# EAGLE board pcb (EAGLE 9.7.0)
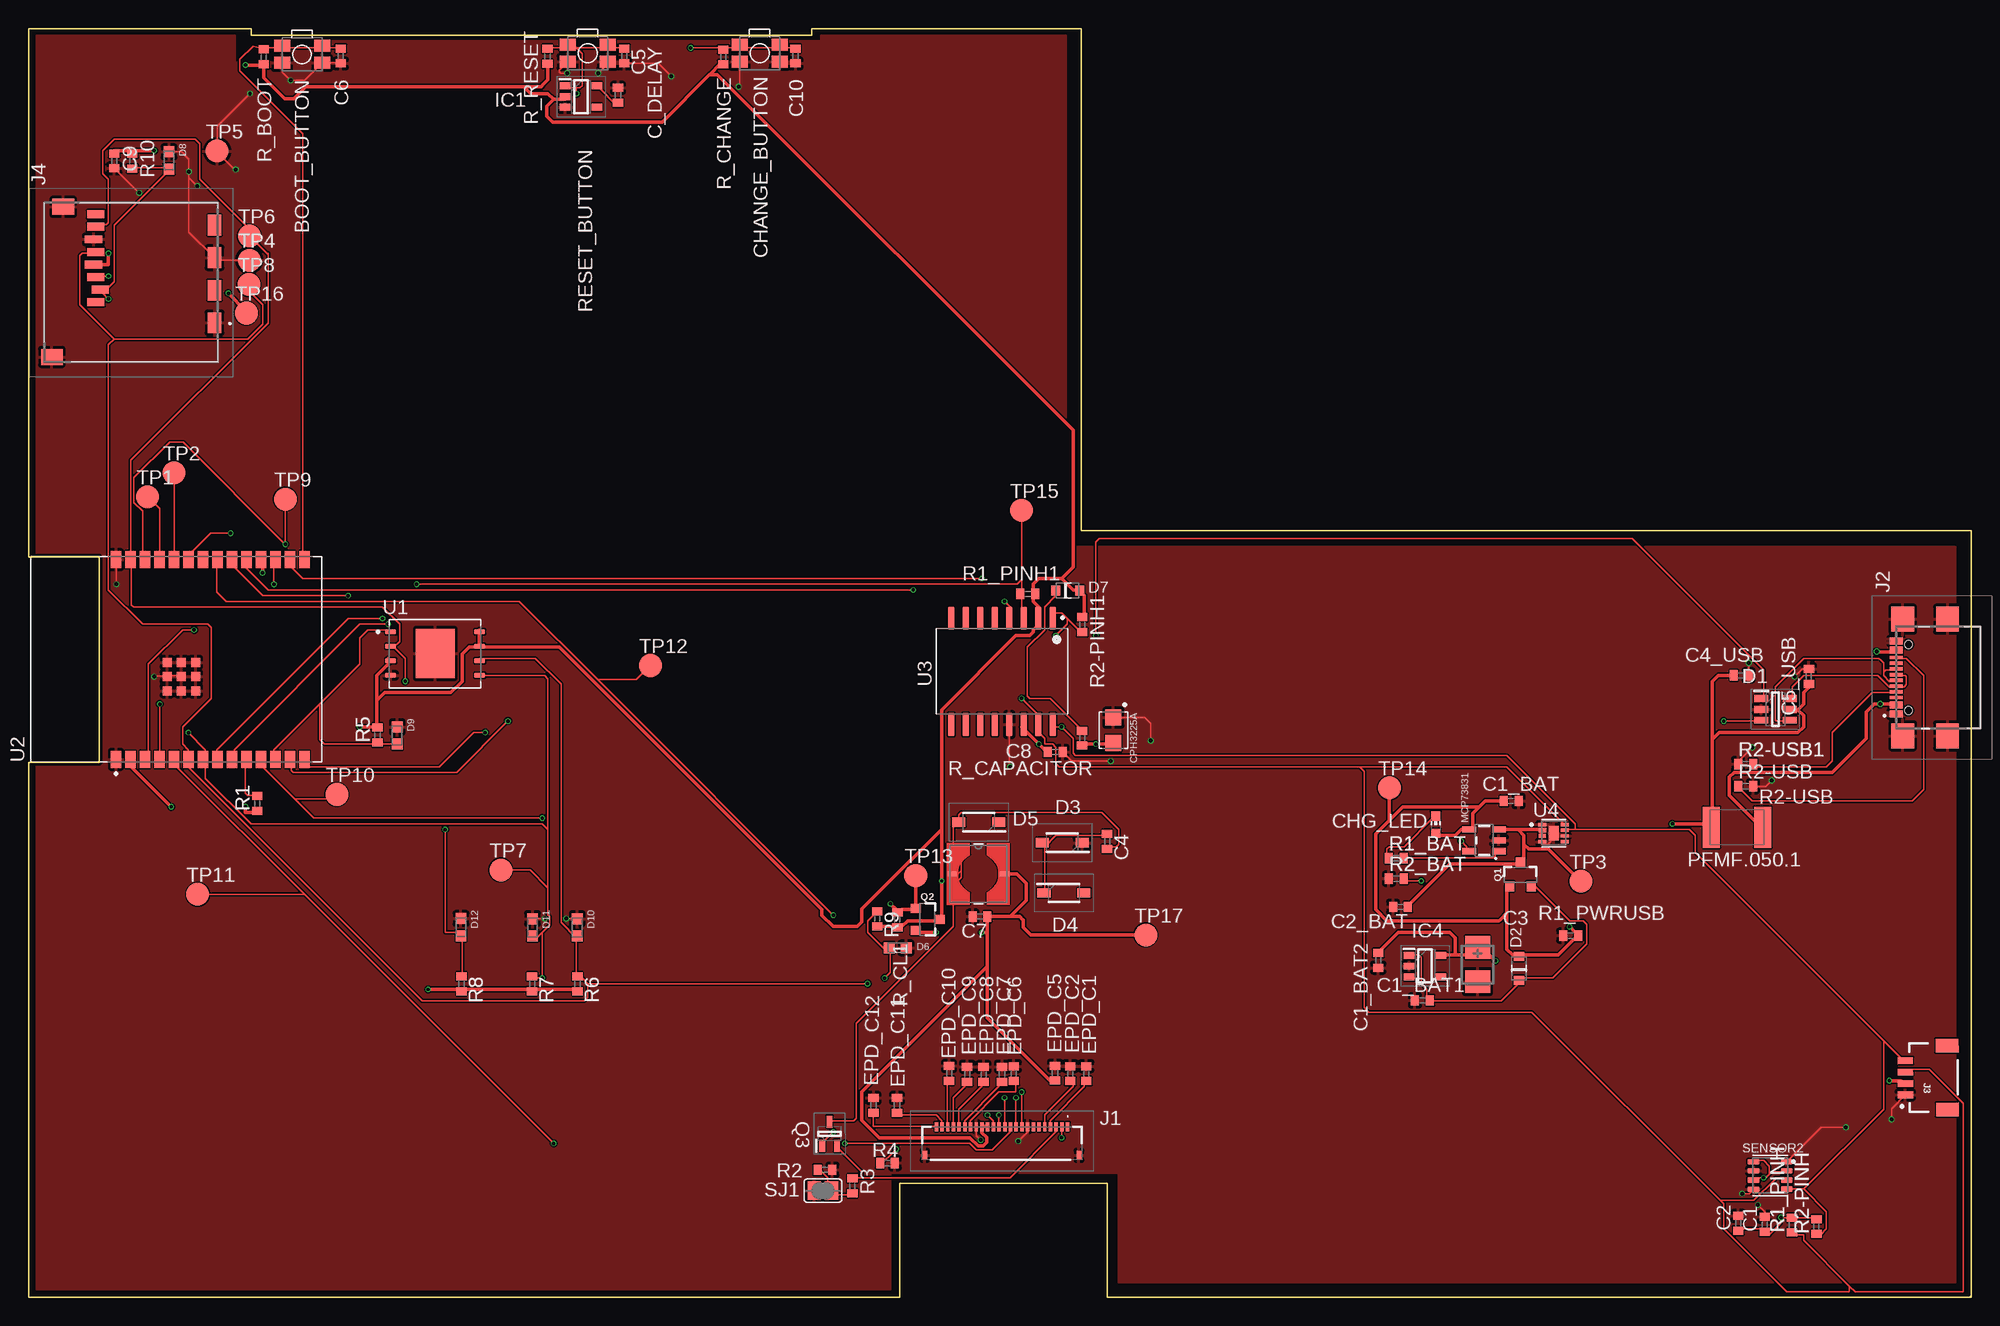
[diagram p0: board, top side]
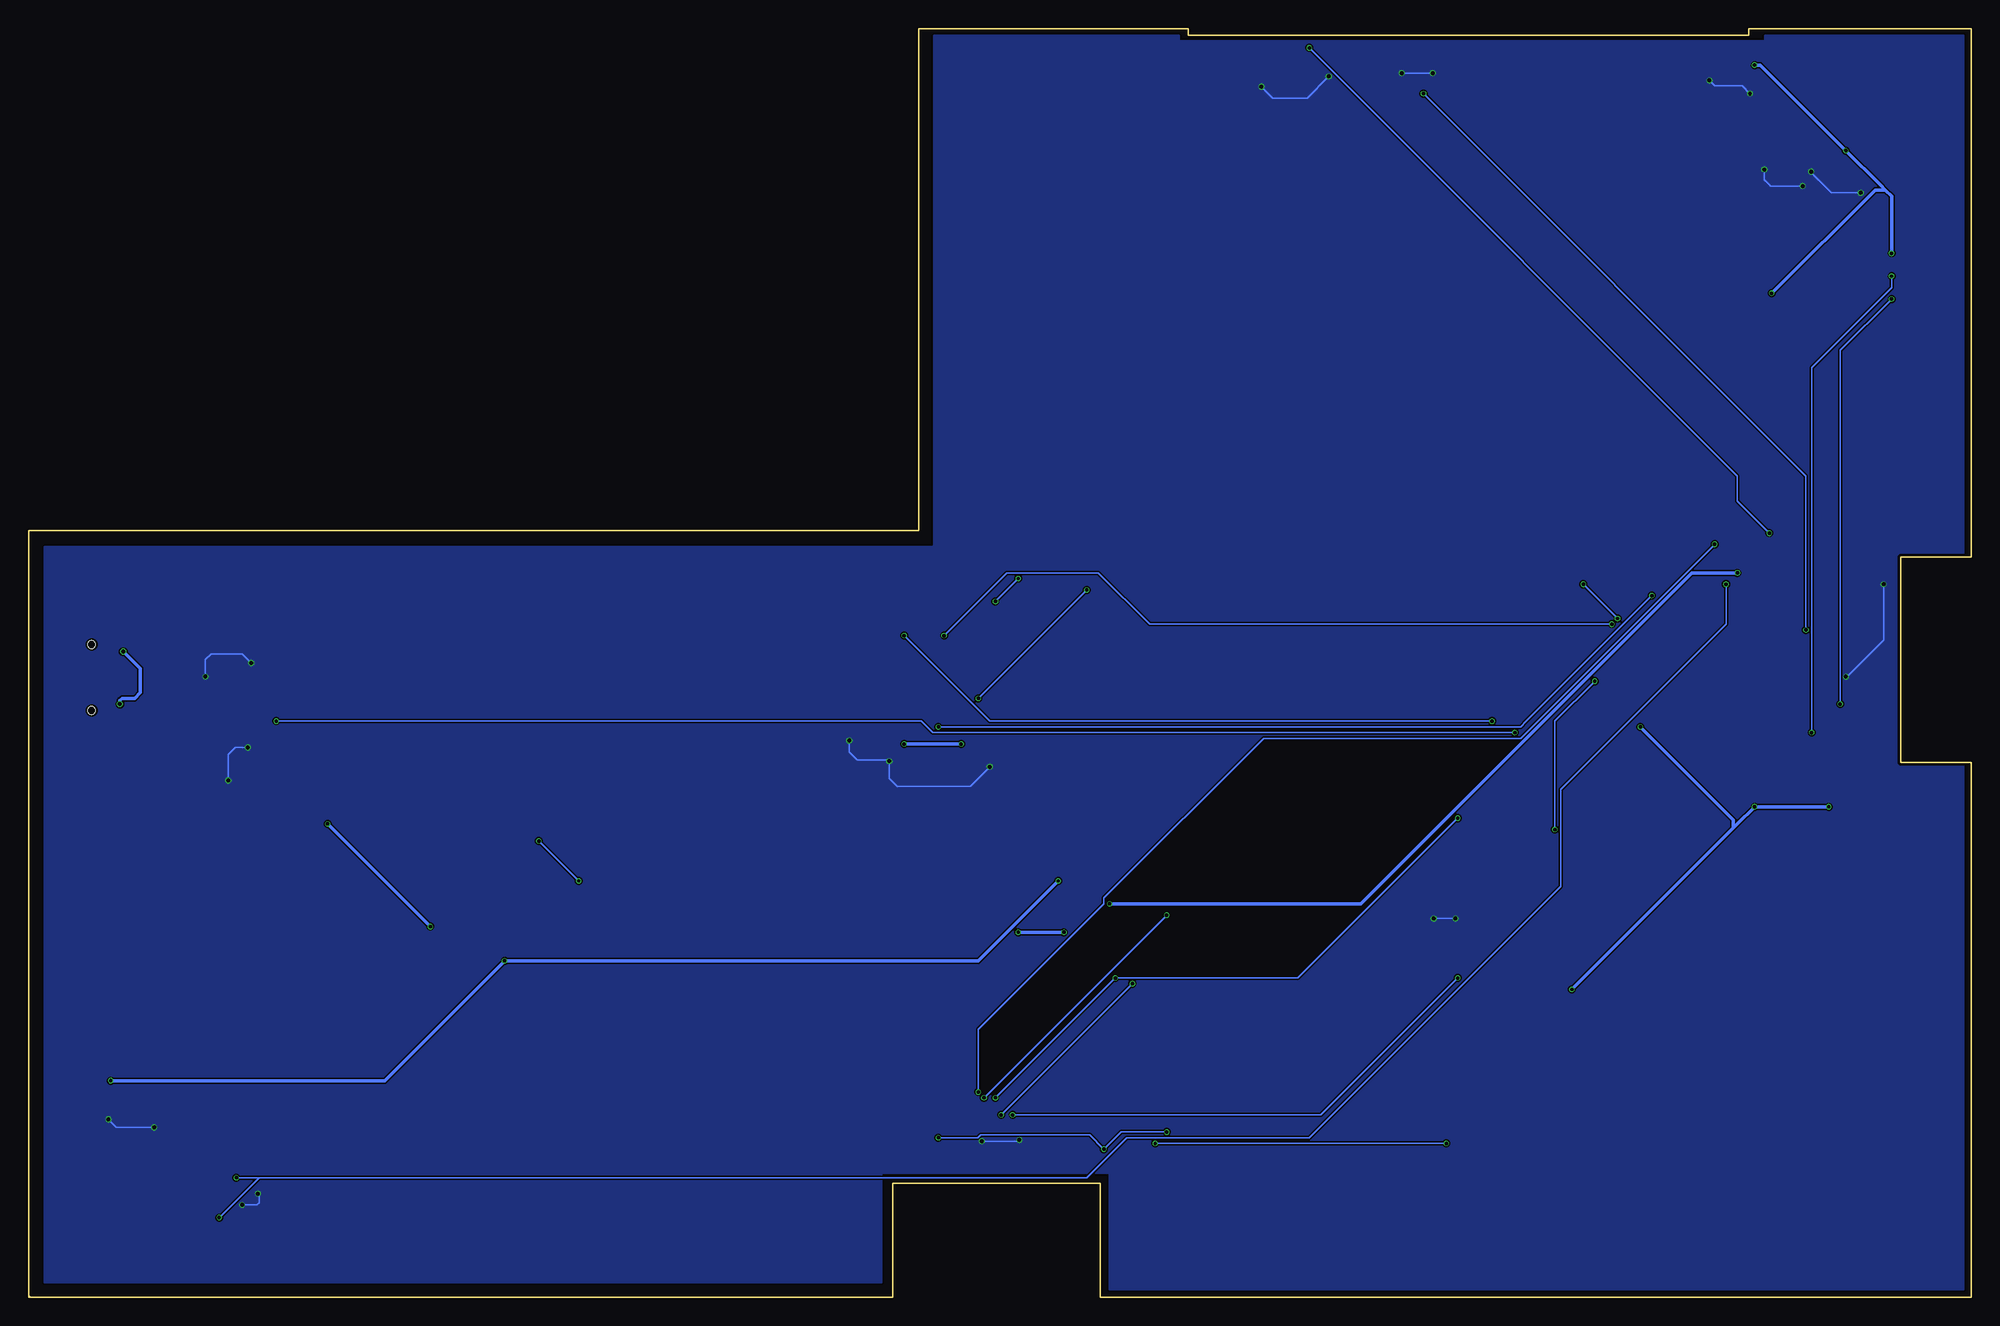
[diagram p1: board, bottom side, seen from below]

Size 170.2 x 111.2 mm. Coordinates in mm from the lower left corner, seen from the top.
Outline: 170.2,0 95.8,0 94.5,0 94.5,10 76.47,10 76.3,10 76.3,0 0,0 0,46.9 6.2,46.9 6.2,64.9 0,64.9 0,111.2 19.5,111.2 19.5,110.6 46,110.6 67.4,110.6 68.6,110.6 68.6,111.2 92.2,111.2 92.2,67.2 170.2,67.2 170.2,0
Outline: 170.1,0.1 170.2,0
Copper layers (1*16): Top 0.035mm / dielectric 1.6mm / Bottom 0.035mm
Design rules "jlcpcb-2layers.dru *": minimum track width 0.15mm, minimum drill 0.3mm, track to track 5mil, track to pad 5mil, pad to pad 5mil, via to via 5mil, smd to smd 5mil, copper to edge 0.2mm, drill to drill 6mil, minimum pad ring 10mil, minimum via ring 3mil, stop-mask expansion 4mil, vias tented up to drill 0mil, thermal gap 10mil
Net classes: 1 power-lines: width 0.3 mm

## Footprints (pad centres in the part's own frame; a part is rotated, then mirrored left to right if it is on the bottom)
MYBUTTON = smd 1.4 x 1.05: 1 1.75,0.75; 2 -1.75,0.75; 3 -1.75,-0.75; 4 1.75,-0.75
ESP32_WROVER_EAGLE-LTSPICE_C0402 = smd 0.7 x 0.9: 1 -0.65,0; 2 0.65,0
RCL_CT3528 = smd 2 x 2.2: + -1.5,0; - 1.5,0
ADAFRUIT_CHIP-LED0603 = smd 0.8 x 0.8: A 0,-0.75; C 0,0.75
CAPCP3225X100N = smd 1.4 x 1.4: 1 -1.1,0; 2 1.1,0
SOT95P280X145-6N = smd 1.2 x 0.6: 1 -1.25,0.95; 2 -1.25,0; 3 -1.25,-0.95; 4 1.25,-0.95; 5 1.25,0; 6 1.25,0.95
ESP32_WROVER_AVX---SD0805S020S1R0_AVX_SD0805S020S1R0_0 = smd 0.8 x 0.9: 1 -1.05,0; 2 1.05,0
SOD3716X135N = smd 1.15 x 0.8: 1 -1.75,0; 2 1.75,0
DIOC1608X36N = smd 0.97 x 0.94: 1 -0.75,0; 2 0.75,0
SOT95P280X125-5N = smd 0.9 x 0.6: 1 -1.4,0.95; 2 -1.4,0; 3 -1.4,-0.95; 4 1.4,-0.95; 5 1.4,0.95
SOT95P280X120-5N = smd 0.9 x 0.6: 1 -1.4,0.95; 2 -1.4,0; 3 -1.4,-0.95; 4 1.4,-0.95; 5 1.4,0.95
FH34SRJ24S05SH99 = smd 0.3 x 0.8: 1 5.75,1.45; 2 5.25,1.45; 3 4.75,1.45; 4 4.25,1.45; 5 3.75,1.45; 6 3.25,1.45; 7 2.75,1.45; 8 2.25,1.45; 9 1.75,1.45; 10 1.25,1.45; 11 0.75,1.45; 12 0.25,1.45; 13 -0.25,1.45; 14 -0.75,1.45; 15 -1.25,1.45; 16 -1.75,1.45; 17 -2.25,1.45; 18 -2.75,1.45; 19 -3.25,1.45; 20 -3.75,1.45; 21 -4.25,1.45; 22 -4.75,1.45; 23 -5.25,1.45; 24 -5.75,1.45 | smd 0.4 x 0.8: MP1 6.75,-1.05; MP2 -6.75,-1.05
SAMACSYS_PARTS_USB4110GFA = smd 0.3 x 1.15: A1 -3.35,3.678; A4 -2.55,3.678; A5 -1.25,3.678; A6 -0.25,3.678; A7 0.25,3.678; A8 1.25,3.678; A9 2.55,3.678; A12 3.35,3.678; B1 3.05,3.678; B4 2.25,3.678; B5 1.75,3.678; B6 0.75,3.678; B7 -0.75,3.678; B8 -1.75,3.678; B9 -2.25,3.678; B12 -3.05,3.678 | smd 2.18 x 2: MP1 -5.11,-0.827; MP2 5.11,-0.827; MP3 -5.11,3.103; MP4 5.11,3.103 | hole 0.65: -2.89,2.603; 2.89,2.603
JST04_1MM_RA = smd 0.6 x 1.35: 1 -1.5,0; 2 -0.5,0; 3 0.5,0; 4 1.5,0 | smd 1.2 x 2: NC1 2.8,-3.675; NC2 -2.8,-3.675
112ATAARR03ATTEND = smd 1.8 x 1.2: G1 10.6,10.4; G2 4.9,10.4; S1 7.75,10.4; S2 2.05,10.4 | smd 1.4 x 1.9: G3 13.6,-3.85; G4 0.45,-2.85 | smd 0.7 x 1.5: P1 8.8,0; P2 7.7,0.4; P3 6.6,0; P4 5.5,-0.2; P5 4.4,0; P6 3.3,-0.2; P7 2.2,0; P8 1.1,0
IND_4828-WE-TPC_WRE = smd 0.813 x 0.406: 1 -2.286,0; 2 2.286,0
ESP32_WROVER_SPARKFUN-IC-POWER_SOT23-5 = smd 0.55 x 1.2: 1 -0.95,-1.3; 2 0,-1.3; 3 0.95,-1.3; 4 0.95,1.3; 5 -0.95,1.3
ESP32C6_VARISTOR_CT/CN1812 = smd 1.5 x 3.6: 1 -2.25,0; 2 2.25,0
ESP32_WROVER_SPARKFUN-DISCRETESEMI_SOT23-3 = smd 0.8 x 0.9: 1 -0.95,-1; 2 0.95,-1; 3 0,1.1
SOT65P210X110-3N = smd 1.05 x 0.5: 1 -1.05,0.65; 2 -1.05,-0.65; 3 1.05,0
ESP32_WROVER_EAGLE-LTSPICE_R0402 = smd 0.7 x 0.9: 1 -0.65,0; 2 0.65,0
ESP32_WROVER_BME680_PSON80P300X300X100-8N = smd 1.016 x 0.5: 1 1.458,1.2; 2 1.458,0.4; 3 1.458,-0.4; 4 1.458,-1.2; 5 -1.458,-1.22; 6 -1.458,-0.4; 7 -1.458,0.4; 8 -1.458,1.2
SJ = smd 1.168 x 1.6: 1 -0.762,0; 2 0.762,0
TP20R = smd 2 x 2: TP 0,0
SON127P600X800X80-9N = smd 0.94 x 0.44: 1 -3.895,1.905; 2 -3.895,0.635; 3 -3.895,-0.635; 4 -3.895,-1.905; 5 3.895,-1.905; 6 3.895,-0.635; 7 3.895,0.635; 8 3.895,1.905 | smd 3.4 x 4.3: 9 0,0
XCVR_ESP32-C6-WROOM-1-N8 = smd 1.5 x 0.9: 1 -8.75,5.26; 2 -8.75,3.99; 3 -8.75,2.72; 4 -8.75,1.45; 5 -8.75,0.18; 6 -8.75,-1.09; 7 -8.75,-2.36; 8 -8.75,-3.63; 9 -8.75,-4.9; 10 -8.75,-6.17; 11 -8.75,-7.44; 12 -8.75,-8.71; 13 -8.75,-9.98; 14 -8.75,-11.25; 15 8.75,-11.25; 16 8.75,-9.98; 17 8.75,-8.71; 18 8.75,-7.44; 19 8.75,-6.17; 20 8.75,-4.9; 21 8.75,-3.63; 22 8.75,-2.36; 23 8.75,-1.09; 24 8.75,0.18; 25 8.75,1.45; 26 8.75,2.72; 27 8.75,3.99; 28 8.75,5.26 | smd 0.8 x 0.8: 29_1 -2.755,0.79; 29_2 -1.505,0.79; 29_3 -0.255,0.79; 29_4 -2.755,-0.46; 29_5 -1.505,-0.46; 29_6 -0.255,-0.46; 29_7 -2.755,-1.71; 29_8 -1.505,-1.71; 29_9 -0.255,-1.71
SOIC127P1032X265-16N = smd 2.05 x 0.59: 1 -4.655,4.445; 2 -4.655,3.175; 3 -4.655,1.905; 4 -4.655,0.635; 5 -4.655,-0.635; 6 -4.655,-1.905; 7 -4.655,-3.175; 8 -4.655,-4.445; 9 4.655,-4.445; 10 4.655,-3.175; 11 4.655,-1.905; 12 4.655,-0.635; 13 4.655,0.635; 14 4.655,1.905; 15 4.655,3.175; 16 4.655,4.445
SON50P200X200X80-9N = smd 0.76 x 0.27: 1 -0.985,0.75; 4 -0.985,-0.75; 5 0.985,-0.75; 6 0.985,-0.25; 7 0.985,0.25; 8 0.985,0.75 | smd 0.762 x 0.381: 2 -0.985,0.25 | smd 0.711 x 0.356: 3 -0.985,-0.25 | smd 0.9 x 1.3: 9 0,0

## Placement (x,y rotation side)
BOOT_BUTTON  BUTTON_CUSYOMV1  [MYBUTTON]  23.96,108.93 180 top
C1  100nF  [ESP32_WROVER_EAGLE-LTSPICE_C0402]  152.09,6.4 90 top
C1_BAT  4.7uF  [ESP32_WROVER_EAGLE-LTSPICE_C0402]  129.88,43.52 0 top
C1_BAT1  4.7uF  [ESP32_WROVER_EAGLE-LTSPICE_C0402]  122.1,26.04 180 top
C1_BAT2  4.7uF  [ESP32_WROVER_EAGLE-LTSPICE_C0402]  118.24,29.54 270 top
C2  100nF  [ESP32_WROVER_EAGLE-LTSPICE_C0402]  149.77,6.5 90 top
C2_BAT  4.7uF  [ESP32_WROVER_EAGLE-LTSPICE_C0402]  120.19,34.22 180 top
C3  100uF TANT  [RCL_CT3528]  126.94,29.17 270 top
C4  4.7uF/25V  [ESP32_WROVER_EAGLE-LTSPICE_C0402]  94.48,39.96 270 top
C4_USB  100nF  [ESP32_WROVER_EAGLE-LTSPICE_C0402]  150.03,54.52 0 top
C5  1nF  [ESP32_WROVER_EAGLE-LTSPICE_C0402]  52.18,108.79 270 top
C5_USB  4.7uF  [ESP32_WROVER_EAGLE-LTSPICE_C0402]  155.96,54.42 90 top
C6  100nF  [ESP32_WROVER_EAGLE-LTSPICE_C0402]  27.35,108.8 270 top
C7  10uF  [ESP32_WROVER_EAGLE-LTSPICE_C0402]  83.35,33.38 180 top
C8  100nF  [ESP32_WROVER_EAGLE-LTSPICE_C0402]  89.93,47.8 0 top
C9  100nF  [ESP32_WROVER_EAGLE-LTSPICE_C0402]  7.51,99.6 270 top
C10  100nF  [ESP32_WROVER_EAGLE-LTSPICE_C0402]  67.19,108.8 270 top
C_DELAY  100nF  [ESP32_WROVER_EAGLE-LTSPICE_C0402]  51.64,105.36 90 top
CHANGE_BUTTON  BUTTON_CUSYOMV1  [MYBUTTON]  64.04,109.03 180 top
CHG_LED  [ADAFRUIT_CHIP-LED0603]  123.27,41.42 0 top
CPH3225A  CPH3225A  [CAPCP3225X100N]  95.03,49.71 270 top
D1  USBLC6-2SC6Y  [SOT95P280X145-6N]  153.03,51.54 0 top
D2  ESP32_WROVER_AVX---SD0805S020S1R0_AVX_SD0805S020S1R0_0_0AVX_SD0805S020S1R0_0_0  [ESP32_WROVER_AVX---SD0805S020S1R0_AVX_SD0805S020S1R0_0]  130.57,28.85 90 top
D3  MBR0530  [SOD3716X135N]  90.56,39.85 180 top
D4  MBR0530  [SOD3716X135N]  90.7,35.45 0 top
D5  MBR0530  [SOD3716X135N]  83.24,41.65 180 top
D6  PGB1010603MR  [DIOC1608X36N]  76.13,30.64 180 top
D7  ESP32_WROVER_AVX---SD0805S020S1R0_AVX_SD0805S020S1R0_0_0AVX_SD0805S020S1R0_0_0  [ESP32_WROVER_AVX---SD0805S020S1R0_AVX_SD0805S020S1R0_0]  91.02,61.95 0 top
D8  PGB1010603MR  [DIOC1608X36N]  12.31,99.64 270 top
D9  PGB1010603MR  [DIOC1608X36N]  32.29,49.24 270 top
D10  PGB1010603MR  [DIOC1608X36N]  48.07,32.44 270 top
D11  PGB1010603MR  [DIOC1608X36N]  44.15,32.44 270 top
D12  PGB1010603MR  [DIOC1608X36N]  37.88,32.45 270 top
EPD_C1  1uF/50V  [ESP32_WROVER_EAGLE-LTSPICE_C0402]  92.65,19.62 270 top
EPD_C2  1uF/50V  [ESP32_WROVER_EAGLE-LTSPICE_C0402]  91.26,19.62 270 top
EPD_C5  0.1uF/50V  [ESP32_WROVER_EAGLE-LTSPICE_C0402]  89.92,19.66 270 top
EPD_C6  1uF/50V  [ESP32_WROVER_EAGLE-LTSPICE_C0402]  86.31,19.62 270 top
EPD_C7  1uF/50V  [ESP32_WROVER_EAGLE-LTSPICE_C0402]  85.28,19.56 270 top
EPD_C8  1uF/50V  [ESP32_WROVER_EAGLE-LTSPICE_C0402]  83.66,19.54 270 top
EPD_C9  1uF/50V  [ESP32_WROVER_EAGLE-LTSPICE_C0402]  82.22,19.56 270 top
EPD_C10  1uF/50V  [ESP32_WROVER_EAGLE-LTSPICE_C0402]  80.64,19.64 270 top
EPD_C11  1uF/50V  [ESP32_WROVER_EAGLE-LTSPICE_C0402]  76.08,16.84 270 top
EPD_C12  1uF/50V  [ESP32_WROVER_EAGLE-LTSPICE_C0402]  74.02,16.84 270 top
IC1  BD5229G-TR  [SOT95P280X125-5N]  48.4,105.24 0 top
IC4  XC6220A331MR-G  [SOT95P280X120-5N]  122.34,29.04 0 top
J1  FH34SRJ-24S-0.5SH_99_  [FH34SRJ24S05SH99]  85.27,13.51 0 top
J2  SAMACSYS_PARTS_USB4110-GF-A  [SAMACSYS_PARTS_USB4110GFA]  167.28,54.33 90 top
J3  QWIIC_RIGHT_ANGLE  [JST04_1MM_RA]  164.41,19.25 90.4 top
J4  112A-TAAR-R03_ATTEND  [112ATAARR03ATTEND]  5.89,96.02 270 top
L1  68uH  [IND_4828-WE-TPC_WRE]  83.2,37.12 0 top
MCP73831  ESP32_WROVER_SPARKFUN-IC-POWER_MCP73831  [ESP32_WROVER_SPARKFUN-IC-POWER_SOT23-5]  127.51,40.06 90 top
PFMF.050.1  ESP32C6_VARISTORCN1812  [ESP32C6_VARISTOR_CT/CN1812]  149.67,41.2 180 top
Q1  20V/4.2A/52mΩ/1.4W  [ESP32_WROVER_SPARKFUN-DISCRETESEMI_SOT23-3]  130.69,37.03 0 top
Q2  20V/4.2A/52mΩ/1.4W  [ESP32_WROVER_SPARKFUN-DISCRETESEMI_SOT23-3]  78.71,33.13 270 top
Q3  SI1308EDL-T1-GE3  [SOT65P210X110-3N]  70.17,14.35 90.1 top
R1  10k  [ESP32_WROVER_EAGLE-LTSPICE_R0402]  20.03,43.28 90 top
R1_BAT  200  [ESP32_WROVER_EAGLE-LTSPICE_R0402]  119.81,38.5 0 top
R1_PINH  10k  [ESP32_WROVER_EAGLE-LTSPICE_R0402]  154.48,6.34 90 top
R1_PINH1  10k  [ESP32_WROVER_EAGLE-LTSPICE_R0402]  87.54,61.66 0 top
R1_PWRUSB  100k  [ESP32_WROVER_EAGLE-LTSPICE_R0402]  135.09,31.71 0 top
R2  2.2  [ESP32_WROVER_EAGLE-LTSPICE_R0402]  69.77,11.18 180 top
R2-PINH  10k  [ESP32_WROVER_EAGLE-LTSPICE_R0402]  156.62,6.22 90 top
R2-PINH1  10k  [ESP32_WROVER_EAGLE-LTSPICE_R0402]  92.3,58.96 90 top
R2-USB  5k1  [ESP32_WROVER_EAGLE-LTSPICE_R0402]  150.43,44.8 0 top
R2-USB1  5k1  [ESP32_WROVER_EAGLE-LTSPICE_R0402]  150.42,46.74 0 top
R2_BAT  2K  [ESP32_WROVER_EAGLE-LTSPICE_R0402]  119.82,36.7 0 top
R3  0.47  [ESP32_WROVER_EAGLE-LTSPICE_R0402]  72.17,9.78 90 top
R4  10k  [ESP32_WROVER_EAGLE-LTSPICE_R0402]  75.25,11.78 180 top
R5  10k  [ESP32_WROVER_EAGLE-LTSPICE_R0402]  30.57,49.28 90 top
R6  10k  [ESP32_WROVER_EAGLE-LTSPICE_R0402]  48.09,27.48 270 top
R7  10k  [ESP32_WROVER_EAGLE-LTSPICE_R0402]  44.11,27.48 270 top
R8  10k  [ESP32_WROVER_EAGLE-LTSPICE_R0402]  37.93,27.48 270 top
R9  10k  [ESP32_WROVER_EAGLE-LTSPICE_R0402]  74.35,33.18 270 top
R10  10k  [ESP32_WROVER_EAGLE-LTSPICE_R0402]  9.09,99.58 90 top
R_BOOT  10k  [ESP32_WROVER_EAGLE-LTSPICE_R0402]  20.61,108.72 270 top
R_CAPACITOR  15  [ESP32_WROVER_EAGLE-LTSPICE_R0402]  92.29,49.01 270 top
R_CHANGE  10k  [ESP32_WROVER_EAGLE-LTSPICE_R0402]  60.86,108.71 270 top
R_CL1  10k  [ESP32_WROVER_EAGLE-LTSPICE_R0402]  76.11,33.1 270 top
R_RESET  10k  [ESP32_WROVER_EAGLE-LTSPICE_R0402]  45.46,108.76 270 top
RESET_BUTTON  BUTTON_CUSYOMV1  [MYBUTTON]  48.98,109.03 180 top
SENSOR2  ESP32_WROVER_BME680_BME680  [ESP32_WROVER_BME680_PSON80P300X300X100-8N]  152.57,10.69 0 top
SJ1  [SJ]  69.59,9.36 0 top
TP1  TPTP20R  [TP20R]  10.44,70.16 0 top
TP2  TPTP20R  [TP20R]  12.76,72.26 0 top
TP3  TPTP20R  [TP20R]  135.98,36.46 0 top
TP4  TPTP20R  [TP20R]  19.34,90.9 0 top
TP5  TPTP20R  [TP20R]  16.52,100.46 0 top
TP6  TPTP20R  [TP20R]  19.34,93.02 0 top
TP7  TPTP20R  [TP20R]  41.37,37.46 0 top
TP8  TPTP20R  [TP20R]  19.29,88.77 0 top
TP9  TPTP20R  [TP20R]  22.5,69.96 0 top
TP10  TPTP20R  [TP20R]  27.02,44.08 0 top
TP11  TPTP20R  [TP20R]  14.82,35.33 0 top
TP12  TPTP20R  [TP20R]  54.47,55.38 0 top
TP13  TPTP20R  [TP20R]  77.72,36.98 0 top
TP14  TPTP20R  [TP20R]  119.22,44.66 0 top
TP15  TPTP20R  [TP20R]  86.97,68.96 0 top
TP16  TPTP20R  [TP20R]  19.09,86.26 0 top
TP17  TPTP20R  [TP20R]  97.87,31.76 0 top
U1  W25Q512JVEIQ  [SON127P600X800X80-9N]  35.62,56.43 0 top
U2  ESP32-C6-WROOM-1-N8  [XCVR_ESP32-C6-WROOM-1-N8]  12.93,55.91 90 top
U3  DS3231SN#  [SOIC127P1032X265-16N]  85.28,54.87 270 top
U4  MAX17048G+T10  [SON50P200X200X80-9N]  133.6,40.69 0 top

## Library data of the parts
BOOT_BUTTON CHANGE_BUTTON CHG_LED PFMF.050.1 RESET_BUTTON SJ1 TP1-TP17 = DeskAssistant v19 v1
C1 C1_BAT C1_BAT1 C1_BAT2 C2 C2_BAT C4 C4_USB C5 C5_USB C6-C10 C_DELAY EPD_C1 EPD_C2 EPD_C5-EPD_C12 = DeskAssistant v19 v1; SPICEMODEL: NONE; SPICEPREFIX: C
C3 = DeskAssistant v19 v1; SPICEPREFIX: C
CPH3225A = DeskAssistant v19 v1; AVAILABILITY: Not in stock; CHECK_PRICES: https://www.snapeda.com/parts/CPH3225A/Seiko+Instruments/view-part/?ref=eda; DESCRIPTION: 11 mF (EDLC) Supercapacitor 3.3 V 1210 (3225 Metric) - -; MF: Seiko Instruments; MP: CPH3225A; PACKAGE: 1210 Seiko; PRICE: None; PURCHASE-URL: https://www.snapeda.com/api/url_track_click_mouser/?unipart_id=562593&manufacturer=Seiko Instruments&part_name=CPH3225A&search_term=None; SNAPEDA_LINK: https://www.snapeda.com/parts/CPH3225A/Seiko+Instruments/view-part/?ref=snap
D1 = DeskAssistant v19 v1; AVAILABILITY: In Stock; CHECK_PRICES: https://www.snapeda.com/parts/USBLC6-2SC6Y/STMicroelectronics/view-part/?ref=eda; DESCRIPTION: 17V Clamp 5A (8/20µs) Ipp Tvs Diode Surface Mount SOT-23-6; MF: STMicroelectronics; MP: USBLC6-2SC6Y; PACKAGE: SOT-23-6 STMicroelectronics; PRICE: None; SNAPEDA_LINK: https://www.snapeda.com/parts/USBLC6-2SC6Y/STMicroelectronics/view-part/?ref=snap
D2 D7 = DeskAssistant v19 v1; CENTROID_NOT_SPECIFIED: No; DATASHEET: http://datasheets.avx.com/schottky.pdf; DIGIKEY_DESCRIPTION: DIODE SCHOTTKY 20V 1A 0805; DIGIKEY_PART_NUMBER: 478-7800-1-ND; LEAD_FREE: yes; MF: AVX; MOUSER_PART_NUMBER: 581-SD0805S020S1R0; PACKAGE: 0805 (2012 metric); PREFIX: D; ROHS: yes; TEMPERATURE_RANGE_HIGH: +125°C; TEMPERATURE_RANGE_LOW: -55°C
D3-D5 = DeskAssistant v19 v1; AVAILABILITY: In Stock; CHECK_PRICES: https://www.snapeda.com/parts/MBR0530/Onsemi/view-part/?ref=eda; DESCRIPTION: Diode Schottky 30 V 500mA Surface Mount SOD-123; MF: ON Semiconductor; MP: MBR0530; PACKAGE: SOD-123-2 ON Semiconductor; PRICE: None; PURCHASE-URL: https://www.snapeda.com/api/url_track_click_mouser/?unipart_id=179458&manufacturer=ON Semiconductor&part_name=MBR0530&search_term=None; SNAPEDA_LINK: https://www.snapeda.com/parts/MBR0530/Onsemi/view-part/?ref=snap
D6 D8-D12 = DeskAssistant v19 v1; AVAILABILITY: In Stock; CHECK_PRICES: https://www.snapeda.com/parts/PGB1010603MR/Littelfuse/view-part/?ref=eda; DESCRIPTION: 150V (Typ) Clamp - Ipp Tvs Diode Surface Mount 0603 (1608 Metric); MF: Littelfuse Inc.; MP: PGB1010603MR; PACKAGE: 0603 Littelfuse Inc.; PRICE: None; PURCHASE-URL: https://www.snapeda.com/api/url_track_click_mouser/?unipart_id=5659453&manufacturer=Littelfuse Inc.&part_name=PGB1010603MR&search_term=None; SNAPEDA_LINK: https://www.snapeda.com/parts/PGB1010603MR/Littelfuse/view-part/?ref=snap
IC1 = DeskAssistant v19 v1; DESCRIPTION: Voltage Detector with Adjustable Delay Time: CMOS processes are utilized to develop high precision, low current consumption CMOS reset ICs that allow arbitrary setting of the delay time. The extensive lineup includes both Nch Open Drain and CMOS output types in a wide range of detection voltages (from 2.3V to 6.0V, in 0.1V steps), enabling selection of the ideal solution based on customer requirements. In addition, the entire series is of course both lead-free and RoHS-compliant.; HEIGHT: 1.25mm; MANUFACTURER_NAME: ROHM Semiconductor; MANUFACTURER_PART_NUMBER: BD5229G-TR; MOUSER_PART_NUMBER: 755-BD5229G-TR; MOUSER_PRICE-STOCK: https://www.mouser.co.uk/ProductDetail/ROHM-Semiconductor/BD5229G-TR?qs=4kLU8WoGk0vvnhrrYwdszw%3D%3D
IC4 = DeskAssistant v19 v1; DESCRIPTION: LDO Voltage Regulators; HEIGHT: 1.2mm; MANUFACTURER_NAME: Torex; MANUFACTURER_PART_NUMBER: XC6220A331MR-G; MOUSER_PART_NUMBER: 865-XC6220A331MR-G; MOUSER_PRICE-STOCK: https://www.mouser.co.uk/ProductDetail/Torex-Semiconductor/XC6220A331MR-G?qs=AsjdqWjXhJ8ZSWznL1J0gg%3D%3D
J1 = DeskAssistant v19 v1; DESCRIPTION: 24 Position FFC, FPC Connector Contacts, Top and Bottom 0.020" (0.50mm) Surface Mount, Right Angle; HEIGHT: 1.1mm; MANUFACTURER_NAME: Hirose; MANUFACTURER_PART_NUMBER: FH34SRJ-24S-0.5SH(99); MOUSER_PART_NUMBER: 798-FH34SRJ24S05SH99; MOUSER_PRICE-STOCK: https://www.mouser.co.uk/ProductDetail/Hirose-Connector/FH34SRJ-24S-0.5SH99?qs=vcbW%252B4%252BSTIpKBl5ap9J8Fw%3D%3D
J2 = DeskAssistant v19 v1; DESCRIPTION: CONN USB 2.0 TYPE-C R/A SMT; HEIGHT: 3.26mm; MANUFACTURER_NAME: GCT (GLOBAL CONNECTOR TECHNOLOGY); MANUFACTURER_PART_NUMBER: USB4110-GF-A; MOUSER_PART_NUMBER: 640-USB4110-GF-A; MOUSER_PRICE-STOCK: https://www.mouser.co.uk/ProductDetail/GCT/USB4110-GF-A?qs=KUoIvG%2F9IlYiZvIXQjyJeA%3D%3D
J3 = DeskAssistant v19 v1; PROD_ID: CONN-13694
J4 = DeskAssistant v19 v1; DESCRIPTION: Micro SD Card Socket, Push-Push Type, Top Mount, SMT, H=1.83mm, 10u; HEIGHT: 1.9mm; MANUFACTURER_NAME: ATTEND; MANUFACTURER_PART_NUMBER: 112A-TAAR-R03 ATTEND
L1 = DeskAssistant v19 v1; COPYRIGHT: Copyright (C) 2024 Ultra Librarian. All rights reserved.; MANUFACTURER_PART_NUMBER: 744043680; MFR_NAME: Wurth Electronics
MCP73831 = DeskAssistant v19 v1; PROD_ID: IC-09995
Q1 Q2 = DeskAssistant v19 v1; PROD_ID: TRAN-14388
Q3 = DeskAssistant v19 v1; AVAILABILITY: In Stock; CHECK_PRICES: https://www.snapeda.com/parts/SI1308EDL-T1-GE3/Vishay+Siliconix/view-part/?ref=eda; DESCRIPTION: Si1308EDL-T1-GE3 N-channel MOSFET Transistor, 1.5 A, 30 V, 3-Pin SC-70 | Siliconix / Vishay SI1308EDL-T1-GE3; MF: Vishay Siliconix; MP: SI1308EDL-T1-GE3; PACKAGE: SOT-323 Vishay Semiconductor; PRICE: None; PURCHASE-URL: https://www.snapeda.com/api/url_track_click_mouser/?unipart_id=274603&manufacturer=Vishay Siliconix&part_name=SI1308EDL-T1-GE3&search_term=None; SNAPEDA_LINK: https://www.snapeda.com/parts/SI1308EDL-T1-GE3/Vishay+Siliconix/view-part/?ref=snap
R1 R1_BAT R1_PINH R1_PINH1 R1_PWRUSB R2 R2-PINH R2-PINH1 R2-USB R2-USB1 R2_BAT R3-R10 R_BOOT R_CAPACITOR R_CHANGE R_CL1 R_RESET = DeskAssistant v19 v1; SPICEMODEL: NONE; SPICEPREFIX: R
SENSOR2 = DeskAssistant v19 v1; AVAILABILITY: Unavailable; DESCRIPTION: Integrated Environmental Unit; MF: Bosch Sensortec; MP: BME680; PACKAGE: LGA-8 Bosch Tools; PRICE: None
U1 = DeskAssistant v19 v1; AVAILABILITY: In Stock; CHECK_PRICES: https://www.snapeda.com/parts/W25Q512JVEIQ/Winbond+Electronics/view-part/?ref=eda; DESCRIPTION: FLASH - NOR Memory IC 512Mb (64M x 8) SPI - Quad I/O 133 MHz 8-WSON (8x6); MF: Winbond Electronics; MP: W25Q512JVEIQ; PACKAGE: Package; PRICE: None; SNAPEDA_LINK: https://www.snapeda.com/parts/W25Q512JVEIQ/Winbond+Electronics/view-part/?ref=snap
U2 = DeskAssistant v19 v1; AVAILABILITY: In Stock; CHECK_PRICES: https://www.snapeda.com/parts/ESP32-C6-WROOM-1-N8/Espressif+Systems/view-part/?ref=eda; DESCRIPTION: Multiprotocol Modules ESP32-C6 module, Wi-Fi 6 in 2.4 GHz band, Bluetooth 5, Zigbee 3.0 and Thread. ESP34-WROOM Compatible - ENGINEERING SAMPLE; MF: Espressif Systems; MP: ESP32-C6-WROOM-1-N8; PACKAGE: None; PRICE: None; SNAPEDA_LINK: https://www.snapeda.com/parts/ESP32-C6-WROOM-1-N8/Espressif+Systems/view-part/?ref=snap
U3 = DeskAssistant v19 v1; AVAILABILITY: In Stock; CHECK_PRICES: https://www.snapeda.com/parts/DS3231SN%23/Analog+Devices/view-part/?ref=eda; DESCRIPTION: Extremely Accurate I²C-Integrated RTC/TCXO/Crystal; MF: Analog Devices; MP: DS3231SN#; PACKAGE: SOIC-16 Maxim; PRICE: None; PURCHASE-URL: https://www.snapeda.com/api/url_track_click_mouser/?unipart_id=99048&manufacturer=Analog Devices&part_name=DS3231SN#&search_term=None; SNAPEDA_LINK: https://www.snapeda.com/parts/DS3231SN%23/Analog+Devices/view-part/?ref=snap
U4 = DeskAssistant v19 v1; AVAILABILITY: In Stock; CHECK_PRICES: https://www.snapeda.com/parts/MAX17048G+T10/Analog+Devices/view-part/?ref=eda; DESCRIPTION: 3µA 1-Cell/2-Cell Fuel Gauge with ModelGauge; MF: Analog Devices; MP: MAX17048G+T10; PACKAGE: TDFN-8 Maxim; PRICE: None; PURCHASE-URL: https://www.snapeda.com/api/url_track_click_mouser/?unipart_id=329239&manufacturer=Analog Devices&part_name=MAX17048G+T10&search_term=None; SNAPEDA_LINK: https://www.snapeda.com/parts/MAX17048G+T10/Analog+Devices/view-part/?ref=snap

## Nets
3V3 [power-lines]: C1_BAT2.1 C3.+ C9.1 D7.2 IC1.2 IC4.5 J3.2 J4.P4 Q2.3 R1.1 R1_PINH1.2 R2-PINH1.2 R5.2 R6.2 R7.2 R8.2 R9.2 R10.2 R_BOOT.2 R_CHANGE.2 R_CL1.2 R_RESET.2 TP16.TP U1.3 U1.7 U1.8 U2.2 U3.2
32KHZ: R2-PINH1.1 U2.9 U3.1
DN: D1.6 J2.A7 J2.B7
DP: D1.4 J2.A6 J2.B6
EPD_3V3 [power-lines]: C7.1 EPD_C5.2 J1.15 J1.16 L1.2 Q2.2 TP17.TP
EPD_3V3_C [power-lines]: Q2.1 R_CL1.1 TP13.TP U2.18
EPD_BUSY: J1.9 TP9.TP U2.26
EPD_CS: D6.2 J1.12 R9.1 TP10.TP U2.11
EPD_DC: J1.11 TP11.TP U2.5
EPD_RST: J1.10 TP12.TP U2.21
FLASH_CS: D9.2 R5.1 U1.1 U2.12
GDR: J1.2 Q3.1 R4.2
GND: BOOT_BUTTON.1 BOOT_BUTTON.2 C1.2 C1_BAT1.2 C1_BAT2.2 C1_BAT.2 C2.2 C2_BAT.2 C3.- C4_USB.2 C5.2 C5_USB.2 C6.2 C7.2 C8.2 C9.2 C10.2 C_DELAY.2 CHANGE_BUTTON.1 CHANGE_BUTTON.2 CPH3225A.1 D1.2 D3.1 D6.1 D8.1 D9.1 D10.1 D11.1 D12.1 EPD_C1.1 EPD_C2.1 EPD_C5.1 EPD_C6.1 EPD_C7.1 EPD_C8.1 EPD_C9.1 EPD_C10.1 EPD_C11.1 EPD_C12.1 IC1.3 IC4.2 J1.8 J1.17 J1.MP1 J1.MP2 J2.A1 J2.A12 J2.B1 J2.B12 J2.MP1 J2.MP2 J2.MP3 J2.MP4 J3.1 J4.G1 J4.G2 J4.G3 J4.G4 J4.P6 MCP73831.2 R1_PWRUSB.1 R2-USB1.1 R2-USB.2 R2.1 R2_BAT.1 R4.1 RESET_BUTTON.1 RESET_BUTTON.2 SENSOR2.1 SENSOR2.5 SENSOR2.7 SJ1.1 TP4.TP TP5.TP U1.4 U1.9 U2.1 U2.28 U2.29_1 U2.29_2 U2.29_3 U2.29_4 U2.29_5 U2.29_6 U2.29_7 U2.29_8 U2.29_9 U3.13 U4.1 U4.4 U4.6 U4.9
GPIO8: R1.2 U2.10
I2C_PW: C1.1 C2.1 R1_PINH.2 R2-PINH.2 SENSOR2.2 SENSOR2.6 SENSOR2.8 U2.17
INT_RTC: R1_PINH1.1 TP15.TP U2.8 U3.3
IO/BOOT: BOOT_BUTTON.3 BOOT_BUTTON.4 C6.1 R_BOOT.1 U2.15
IO/CHANGE: C10.1 CHANGE_BUTTON.3 CHANGE_BUTTON.4 R_CHANGE.1 U2.23
MISO: D12.2 J4.P7 R8.1 TP6.TP U1.2 U2.27
MOSI: D11.2 J1.14 J4.P3 R7.1 TP7.TP U1.5 U2.7
N$1: J2.B5 R2-USB.1
N$2: J2.A5 R2-USB1.2
N$3: C1_BAT1.1 D2.1 IC4.1 IC4.3 Q1.2
N$5: D7.1 R_CAPACITOR.1
N$6: MCP73831.5 R2_BAT.2
N$8: MCP73831.1 R1_BAT.2
N$9: CHG_LED.C R1_BAT.1
N$10: EPD_C1.2 J1.4
N$11: EPD_C2.2 J1.5
N$13: C_DELAY.1 IC1.5
N$15: C4.1 D3.2 D4.1
N$20: EPD_C6.2 J1.18
N$21: EPD_C7.2 J1.19
N$22: EPD_C8.2 J1.20
N$23: EPD_C9.2 J1.21
N$24: EPD_C10.2 J1.22
N$25: EPD_C11.2 J1.23
N$26: EPD_C12.2 J1.24
PREVGH: D5.1
PREVGL: D4.2
RESE: J1.3 Q3.2 R3.2
RESE': R2.2 R3.1 SJ1.2
RESET: C5.1 IC1.1 R_RESET.1 RESET_BUTTON.3 RESET_BUTTON.4 U2.3
RTC_RST: U2.16 U3.4
RX: TP2.TP U2.24
SCK: D10.2 J1.13 J4.P5 R6.1 TP8.TP U1.6 U2.6
SCL: J3.4 R2-PINH.1 SENSOR2.4 U2.20 U3.16 U4.7
SDA: J3.3 R1_PINH.1 SENSOR2.3 U2.19 U3.15 U4.8
SRC: C4.2 D5.2 L1.1 Q3.3
SS_SD: D8.2 J4.P2 R10.1 U2.4
TX: TP1.TP U2.25
USB_D+: D1.3 U2.14
USB_D-: D1.1 U2.13
VBAT [power-lines]: C2_BAT.1 MCP73831.3 Q1.3 TP3.TP U4.2 U4.3
VBUS [power-lines]: C1_BAT.1 C4_USB.1 C5_USB.1 CHG_LED.A D1.5 D2.2 MCP73831.4 PFMF.050.1.2 Q1.1 R1_PWRUSB.2 TP14.TP
VRTC [power-lines]: C8.1 CPH3225A.2 R_CAPACITOR.2 U3.14
VUSB [power-lines]: J2.A4 J2.A9 J2.B4 J2.B9 PFMF.050.1.1

## Tracks (layer width: path | path; a pad name or v marks a point on that pad's centre or on a via)
3V3  (via drill 0.3)
  Top 0.3: 39.5,57 39.5,58.5 U1.8 | 39.5,57 U1.7 | 30.5,52.3 30.5,53 30.5,54.5 31.5,55.5 31.5,56 U1.3 | 30.5,52.3 30.5,50 | 30.5,50 R5.2 30.5,50 | 39.5,57 38.6,57 38,56.4 38,56.3 38,54 37,53 31.6,53 31.2,53 30.5,52.3 | 39.5,57 U1.7 | R6.2 48,27 44.5,27 R7.2 44,27 38,27 R8.2 37.5,27 v35,27 | v19,43 19,42.5 20,42.5 R1.1 | v12.5,43 9,46.5 9,47 U2.2 | v29,50 30.5,50 | 125,30 126.5,30 126.5,30.5 C3.+ 127,31 v128.5,29.5 | 125,30 124,30 IC4.5 | 125,30 125,31.5 124.5,32 124.4,32 120,32 118.5,30.5 C1_BAT2.1 | v163,19 164,19 J3.2 | R9.2 74.5,32.5 76,32.5 R_CL1.2 76.5,32.5 77,33 79.5,33 Q2.3 80,33.5 v80,36.5 80,41 | 92,62 92.5,61.5 92.5,59.5 R2-PINH1.2 | 92,62 D7.2 92,62 | 92,62 91.7,62 91.5,62 91,62.5 90.5,63 | 90.5,63 88.5,63 88,62.5 88,62 R1_PINH1.2 88,61.5 88,61 88.5,60.5 88.5,60 U3.2 88.5,59.5 88.5,59 88,58.5 88,58.3 87.7,58 86.5,58 80,51.5 80,41 | C9.1 7.5,100.5 9,100.5 R10.2 9.5,100.5 v11,100.5 | 44.4,106.1 44.9,106.1 | 44.4,106.1 43.4,106.1 | 43.4,106.1 24.3,106.1 23.25,105.05 22.45,105.05 22.3,105.2 20.6,106.9 R_BOOT.2 20.2,108 v19,108 | R_RESET.2 45.5,108 45.5,107 45.5,106.8 45.5,106.7 45.1,106.3 | 46,105 47,105 IC1.2 | 59.65,107.15 55.5,103 46,103 45.9,103 45.4,103.5 45.4,104.4 46,105 | v7,91.5 7,90.5 6,90.5 J4.P4 | v17.5,88 19,86.5 TP16.TP | 90.5,63 91.5,64 91.5,76 60.55,106.95 60.35,107.15 60.25,107.15 59.65,107.15 | 39.5,57 46.5,57 69.5,34 69.5,33.5 70.5,32.5 72.6,32.5 73,32.9 73,34.07 77.19,38.26 77.26,38.26 80,41 | 39.5,57 U1.7 | 59.65,107.15 59.7,107.2 60.56,108.06 R_CHANGE.2 | 46,105 45.5,105.5 44.1,105.5 44,105.5 43.4,106.1 | 45.15,106.35 45.1,106.3 | 45.1,106.3 44.9,106.1 | 44.9,106.1 44.4,106.1
  Bottom 0.3: v12.5,43 v19,43 20.5,41.5 20.85,41.15 | 20.85,41.15 20.9,41.1 | 20.9,41.1 v35,27 | v29,50 20.85,41.85 20.85,41.15 | v163,19 139,19 v128.5,29.5 87,29.5 v80,36.5 | v19,108 18.5,108 v11,100.5 8,97.5 7.55,97.05 | v7,91.5 7,96.5 7.55,97.05 | v17.5,88 8.45,97.05 7.55,97.05 | 20.65,41.35 20.85,41.15 | 20.85,41.15 20.9,41.1
32KHZ  (via drill 0.3)
  Top 0.15: 91,59.5 90.5,60 90,60 U3.1 | 91,59.5 92,58.5 R2-PINH1.1 | v31.5,59 29,59 18,48 18,47.5 U2.9 | v90,58 91,59 91,59.5
  Bottom 0.15: v31.5,59 72,59 76.5,63.5 84.5,63.5 v90,58
DN
  Top 0.15: J2.A7 164,54.5 164.4,54.5 164.5,54.4 164.5,54.1 164.5,53.8 164.5,53.7 164.3,53.5 164,53.5 J2.B7 163.5,53.5 163,53.5 162,54.5 155.5,54.5 154.5,53.5 154.5,52.5 D1.6
DP
  Top 0.15: J2.A6 163.5,54 163,54 162.5,54.5 162.5,54.8 | 162.5,54.8 162.5,55.4 162.5,55.6 162.25,55.85 162.1,56 155.5,56 153,53.5 153,50.9 153,50.6 153.1,50.5 154,50.5 D1.4 | J2.B6 163.52,55 163,55 162.7,55 162.5,54.8
EPD_3V3  (via drill 0.3)
  Top 0.3: 83.5,15 84,15 J1.15 | 83.5,15 J1.16 83.5,15 | 84,32 84,33 C7.1 85.98,33.38 | 84,32 84,29 | 84,29 84,24.5 89.5,19 EPD_C5.2 | v79.5,32 78,32 Q2.2 | 84,32 v83.5,32 | 84,29 73,18 73,15.5 74.5,14 82.45,14 83.18,13.27 83.62,13.27 83.93,13.58 83.93,14.02 83.5,14.45 83.5,15 | 85.98,33.38 87.4,34.8 87.4,36.3 86.58,37.12 L1.2 | TP17.TP 87.8,31.76 87.13,32.43 87.13,33.07 87.1,33.1 86.82,33.38 85.98,33.38
  Bottom 0.3: v83.5,32 v79.5,32
EPD_3V3_C  (via drill 0.3)
  Top 0.3: v20.5,63.5 20.5,64.5 U2.18 | v75.5,34.5 76,34 R_CL1.1 76.5,34 77.5,34 Q2.1 TP13.TP
  Bottom 0.3: v20.5,63.5 24.5,63.5 53.5,34.5 v75.5,34.5
EPD_BUSY  (via drill 0.3)
  Top 0.15: v87,18 87,15 J1.9 | TP9.TP v22.5,66 13.54,74.96 12.36,74.96 9.24,71.84 9.24,69.66 10,68.9 10,64.87 U2.26
  Bottom 0.15: v87,18 87,23.5 76,34.5 76,35 62,49 39.5,49 v22.5,66
EPD_CS  (via drill 0.3)
  Top 0.15: v85.5,17.5 85.5,15 J1.12 | v75,28 75.5,28.5 75.5,30.5 D6.2 75,30.5 73.5,32 73.5,33 74,33.5 R9.1 | 23.3,43.7 25,42 v45,42 | 23.3,43.7 20.5,46.5 20.5,47 U2.11 | TP10.TP 26.64,43.7 23.3,43.7
  Bottom 0.15: v85.5,17.5 v75,28 59,28 v45,42
EPD_DC  (via drill 0.3)
  Top 0.15: 24.15,35.35 13,46.5 13,47 U2.5 | 24.15,35.35 v46,13.5 | J1.11 86,15 86,14.5 84.42,12.92 83.03,12.92 82.45,13.5 v71.5,13.5 | TP11.TP 24.13,35.33 24.15,35.35
  Bottom 0.15: v46,13.5 v71.5,13.5
EPD_RST  (via drill 0.3)
  Top 0.15: v86.5,17.5 86.5,15 J1.10 | 49.85,54.15 43,61 17.8,61 17.3,61 16.5,61.8 16.5,64.5 U2.21 | 49.85,54.15 v70.5,33.5 | TP12.TP 53.24,54.15 49.85,54.15
  Bottom 0.15: v70.5,33.5 v86.5,17.5
FLASH_CS
  Top 0.15: D9.2 32,48.5 31,48.5 R5.1 30.5,48.5 25.9,48.5 | 25.5,52 21.5,48 21.5,47.5 U2.12 | 25.5,52 29,55.5 29,57.8 29.7,58.5 29.9,58.5 31.5,58.5 U1.1 | 25.5,52 25.5,48.9
  Top 0.152: 25.9,48.5 25.5,48.9
GDR  (via drill 0.3)
  Top 0.15: v90.5,14 90.5,15 J1.2 | v76,13 74.5,11.5 R4.2 | v70.5,14.5 69.5,13.5 Q3.1
  Bottom 0.15: v70.5,14.5 74.5,14.5 v76,13 77.25,14.25 86.79,14.25 87.04,14 v90.5,14
GND  (via drill 0.35)
  Top 0.15: U2.29_5 13,54.5 12.5,54.5 12.29,54.44 | 12.29,54.44 U2.29_2 | CPH3225A.1 97.8,50.81 98.3,50.31 98.3,50.2 v98.3,48.8 | v94.8,47 91.5,47 91.38,47 C8.2 | D11.1 v45.2,33.2 | v47.1,33.2 D10.1 | CHANGE_BUTTON.1 62.29,106.19 v62.2,106.1 | v56.3,107 55.2,108.1 55.16,108.14 C5.2 | SENSOR2.1 157.04,14.9 v159.2,14.9 | v163.2,15.6 163.2,16.53 J3.1 | C9.2 9.66,96.8 v9.7,96.8 | D8.1 13.41,100.39 13.95,99.85 14.05,99.75 14.05,99.5 v14.05,98.65 14.05,98.6 | R2-USB.2 152.2,44.8 v152.7,45.3 | v151,48.2 149.77,46.97 R2-USB1.1 | TP4.TP 16.52,90.9 J4.G2 14.05,93.36 14.05,98.6 | v18.15,98.85 18.1,98.8 16.52,100.38 TP5.TP 16.52,102.62 v19.4,105.5 | v14.8,97.4 14.05,98.15 14.05,98.6 | BOOT_BUTTON.1 22.21,107.5 22.21,107.39 22.55,107.05 v22.95,106.65 24.18,106.65 BOOT_BUTTON.2 27.32,108.18 C6.2 | U2.28 7.7,64.63 v7.7,62.5 | v11,54.4 11.04,54.44 12.29,54.44 | C4_USB.2 150.68,55.58 v150.7,55.6 | v154.7,54.4 155.37,55.07 C5_USB.2 | v86,46.5 85.9,46.6 85.9,49.4 | RESET_BUTTON.1 46.5,107.55 46.5,107.4 46.6,107.3 v47.2,107.3 | v49.9,107.3 50.73,108.13 RESET_BUTTON.2 | SENSOR2.5 150.74,9.1 v150.1,9.1 | v151.5,8.1 152.09,7.51 C1.2 | U4.9 133.35,40.45 133.35,40.4 133.35,39.95 133.1,39.7 132.85,39.7 U4.4 | J1.17 83.02,14.18 v83.4,13.8 | v86.7,13.7 87.52,14.52 J1.8
  Bottom 0.15: v98.3,48.8 98.3,47.8 98.2,47.7 97.6,47.1 97.4,47.1 95,47.1 94.9,47 v94.8,47 94.8,45.5 94.1,44.8 87.7,44.8 v86,46.5 | v45.2,33.2 46.2,33.2 v47.1,33.2 | v62.2,106.1 61.2,105.1 60,105.1 58.2,105.1 v56.3,107 | v159.2,14.9 162.5,14.9 163,15.4 v163.2,15.6 | v9.7,96.8 12.3,96.8 14.1,98.6 v14.05,98.65 | v152.7,45.3 152.7,47.6 152.1,48.2 v151,48.2 | v18.15,98.85 18.15,97.95 18.1,97.9 17.6,97.4 16.6,97.4 14.9,97.4 v14.8,97.4 | v19.4,105.5 20.1,106.2 21.4,106.2 22.5,106.2 v22.95,106.65 | v7.7,62.5 7.7,57.6 10.9,54.4 v11,54.4 | v150.7,55.6 151.5,56.4 154.2,56.4 154.7,55.9 v154.7,54.4 | v47.2,107.3 v49.9,107.3 | v150.1,9.1 150,9 150,8.3 150.2,8.1 v151.5,8.1 | v86.7,13.7 83.5,13.7 v83.4,13.8
  pour Top: 69.36,110.16 69.34,110.14 69.32,110.12 18.28,110.12 18.28,108.28 18.26,108.26 18.24,108.24 18.22,108.22 18.18,108.22 18.16,108.24 18.14,108.26 18.12,108.28 18.12,110.62 0.68,110.62 0.68,0.68 75.52,0.68 75.52,10.82 75.54,10.84 75.56,10.86 75.58,10.88 95.42,10.88 95.44,10.86 95.46,10.84 95.48,10.82 95.48,1.28 168.82,1.28 168.82,65.82 90.98,65.82 90.96,65.84 90.94,65.86 90.92,65.88 90.92,110.62 69.38,110.62 69.38,110.18
  pour Bottom: 69.34,110.14 69.32,110.12 18.18,110.12 18.16,110.14 18.14,110.16 18.12,110.18 18.12,110.62 0.68,110.62 0.68,0.68 75.52,0.68 75.52,10.82 75.54,10.84 75.56,10.86 75.58,10.88 95.42,10.88 95.44,10.86 95.46,10.84 95.48,10.82 95.48,1.28 168.82,1.28 168.82,65.82 90.98,65.82 90.96,65.84 90.94,65.86 90.92,65.88 90.92,110.62 69.38,110.62 69.38,110.18 69.36,110.16
GPIO8
  Top 0.15: R1.2 20,44 19.2,44 19,44.2 19,44.4 19,47 U2.10
I2C_PW  (via drill 0.3)
  Top 0.15: 154.5,7 156.5,7 R2-PINH.2 | 154.5,7 R1_PINH.2 154.5,7 | C2.1 150,6 152,6 C1.1 152.5,5.5 153.5,6.5 v153.5,7 154.5,7 | 152.5,10.8 152.5,11 152.5,11.5 152,12 151.5,12 SENSOR2.8 | SENSOR2.6 151.5,10.5 v152,10.5 152.2,10.5 152.5,10.8 | SENSOR2.2 154,11 152.7,11 152.5,10.8 | v21.5,62.5 21.5,64.5 U2.17
  Bottom 0.15: v21.5,62.5 21.5,59 36,44.5 36,36 58,14 74,14 77.5,10.5 150,10.5 | v152,10.5 150,10.5 | 150,10.5 v153.5,7
INT_RTC  (via drill 0.3)
  Top 0.15: U3.3 87,60 87,61.5 R1_PINH1.1 87,62 87,62.5 87,63 | v31,59.5 28,59.5 16.5,48 16.5,47.5 U2.8 | v34,62.5 86.6,62.5 87,62.9 87,63 | 87,63 87,68.96 TP15.TP
  Bottom 0.15: v34,62.5 v31,59.5
IO/BOOT
  Top 0.15: C6.1 27.3,109.5 25.77,109.5 BOOT_BUTTON.3 25.45,109.5 24.5,109.5 22.27,109.5 BOOT_BUTTON.4 21.95,109.5 20.7,109.5 R_BOOT.1 19.67,109.67 18.5,108.5 18.5,107.5 24,102 24,65 U2.15
IO/CHANGE  (via drill 0.3)
  Top 0.15: C10.1 67,109.5 66,109.5 CHANGE_BUTTON.3 65.5,109.5 62.5,109.5 CHANGE_BUTTON.4 62,109.5 61,109.5 R_CHANGE.1 60.5,109.5 v58,109.5 | U2.23 14,65 15.97,66.97 v17.7,66.97
  Bottom 0.15: 20.5,72 v58,109.5 | 18.46,67.74 v17.7,66.97
  Bottom 0.152: 18.46,67.74 20.5,69.77 20.5,72
MISO  (via drill 0.3)
  Top 0.15: J4.P7 6,94 6.8,94 7,94.2 7,98 6.5,98.5 6.5,100.5 7.5,101.5 14.6,101.5 15,101.1 15,101 15,98 19,94 19,93.5 TP6.TP | R8.1 38,28 38,31.5 D12.2 37.5,32 36.5,32 v36.5,41 | 32,57 32.5,57.5 32.5,59 31,60.5 9.4,60.5 9.2,60.5 9,60.7 9,64.5 U2.27 8.96,64.68 8.96,73.36 21,85.4 21,91.4 | 32,57 U1.2 32,57 | v33,54 33,56 32,57 | 21,91.4 21,91.5 | 19.5,93 TP6.TP | TP6.TP 19.38,93.02 21,91.4
  Bottom 0.15: v36.5,41 36.5,50.5 v33,54
MOSI  (via drill 0.3)
  Top 0.15: v84,16 84.5,15.5 84.5,15 J1.14 | R7.1 44.5,28 v45,28 45,32 | 45.2,54.5 39.5,54.5 U1.5 | 45.5,53.9 45.5,41.5 45.5,40.8 45.5,35.9 | 45,32 44.5,31.5 D11.2 | 45,41.5 19.5,41.5 15.5,45.5 15.5,47 U2.7 15.5,47.5 15.5,48 v14,49.5 | v7,89.5 6,89.5 J4.P3 | 45.5,35.9 45.5,33.54 45.65,33.39 45.65,32.65 45,32 | TP7.TP 43.94,37.46 45.5,35.9
  Top 0.152: 45.2,54.5 45.5,54.2 45.5,53.9 | 45,41.5 45.5,41 45.5,40.8
  Bottom 0.15: v84,16 57,16 v45,28 | v7,89.5 7,88.5 14,81.5 v14,49.5
N$1
  Top 0.15: R2-USB.1 150,44.5 151,43.5 165,43.5 166,44.5 166,54.5 164.5,56 164,56 J2.B5
N$2
  Top 0.15: R2-USB1.2 151,46.5 157.5,46.5 158,47 158,47.3 158,49.5 161.5,53 163.5,53 J2.A5
N$3
  Top 0.15: 122,27.5 121.5,28 121,28 IC4.3 | 122,27.5 122.5,27 122.5,26 C1_BAT1.1 123,26 129,26 130.5,27.5 D2.1 131,28 133.5,28 136.5,31 136.5,32.7 136.2,33 136,33 135,33 132,36 Q1.2 | 122,27.5 122,29.8 121.8,30 121,30 IC4.1
N$5
  Top 0.15: 87.7,52.5 89.5,52.5 92,50 R_CAPACITOR.1 | 87.5,52.8 87.5,57 89,58.5 89,60.5 90,61.5 90,62 D7.1
  Top 0.152: 87.7,52.5 87.5,52.7 87.5,52.8
N$6  (via drill 0.3)
  Top 0.15: v122,36.5 120.5,36.5 R2_BAT.2 | v125.5,40 126,39.5 126,39 MCP73831.5
  Bottom 0.15: v125.5,40 v122,36.5
N$8
  Top 0.15: R1_BAT.2 120.5,38.5 128.2,38.5 128.3,38.5 128.5,38.7 128.5,39 MCP73831.1
N$9
  Top 0.15: CHG_LED.C 123,42 120.5,39.5 119.2,39.5 119,39.3 119,38.5 R1_BAT.1
N$10
  Top 0.15: J1.4 89.5,15 89.5,15.5 92.5,18.5 92.5,19 EPD_C1.2
N$11
  Top 0.15: J1.5 89,15 89,16 91.5,18.5 91.5,19 EPD_C2.2
N$13
  Top 0.15: IC1.5 50,106 51.5,104.5 C_DELAY.1
N$15
  Top 0.15: 89,39.5 90,40.5 94.5,40.5 C4.1 | 89,39.5 D3.2 89,39.5 | 89,39.5 89,35.5 D4.1
N$20
  Top 0.15: J1.18 82.5,15 82.5,15.5 85,18 86.5,18 86.5,19 EPD_C6.2
N$21
  Top 0.15: J1.19 82,15 82,15.5 85,18.5 85,19 EPD_C7.2
N$22
  Top 0.15: J1.20 81.5,15 81.5,16.5 83.5,18.5 83.5,19 EPD_C8.2
N$23
  Top 0.15: J1.21 81,15 81,17.5 82,18.5 82,19 EPD_C9.2
N$24
  Top 0.15: J1.22 80.5,15 80.5,19 EPD_C10.2
N$25
  Top 0.15: J1.23 80,15 80,15.5 79.5,16 76.5,16 EPD_C11.2
N$26
  Top 0.15: J1.24 79.5,15 74,15 74,16 EPD_C12.2
RESE
  Top 0.15: 73,10.5 72.5,10.5 R3.2 | 73,10.5 86,10.5 90,14.5 90,15 J1.3 | 73,10.5 73,11 71,13 Q3.2
RESE'
  Top 0.15: R3.1 72,9 70.5,9 SJ1.2 70,9.5 70,10.5 69.5,11 69,11 R2.2
RESET  (via drill 0.3)
  Top 0.15: C5.1 52,109.5 51.2,109.5 RESET_BUTTON.3 50.7,109.5 48,109.5 | 48,106 48.3,106 48.5,106.2 48.5,106.3 48.5,109 48,109.5 | 48,106 47,106 IC1.1 | 48,109.5 47.56,109.94 RESET_BUTTON.4 47.2,109.5 45.5,109.5 R_RESET.1 | v14.5,58.5 13.5,58.5 10.5,55.5 10.5,47.5 U2.3 | 48,106 v48,105.5
  Bottom 0.15: v14.5,58.5 14.5,72 v48,105.5
RTC_RST  (via drill 0.3)
  Top 0.15: v83.5,63 24,63 23,64 23,64.5 U2.16 | v85.5,61 86,60.5 86,60 U3.4
  Bottom 0.15: v85.5,61 v83.5,63
RX
  Top 0.15: TP2.TP U2.24
SCK  (via drill 0.3)
  Top 0.15: U1.6 39.5,56 44.39,56 46.65,53.74 46.65,32.85 48,31.5 | 48,31.5 D10.2 48,31.5 | 7.5,84 4.5,87 4.5,91.3 4.7,91.5 5.5,91.5 J4.P5 | TP8.TP 19.5,88.5 19.5,88 20.5,87 20.5,85.29 19.21,84 7.5,84 | v85,16 85,15 J1.13 | 49,27.5 v73.5,27.5 | 49,27.5 48.5,28 R6.1 48,28 48,31.5 | 48.7,26 34.5,26 14,46.5 14,47 U2.6 14,47.5 14,48 13.5,48.5 13.5,50 16,52.5 16,58.7 15.7,59 10,59 7,62 7,83.5 7.5,84 | 49,26.7 49,27.5
  Top 0.152: 48.7,26 49,26.3 49,26.7
  Bottom 0.15: v73.5,27.5 v85,16
SCL  (via drill 0.3)
  Top 0.15: 155.5,9.5 157.5,7.5 157.5,6 157,5.5 R2-PINH.1 | 155.5,9.5 154.5,9.5 SENSOR2.4 | 135.5,41 145.4,41 145.5,41 146,40.5 146,39 162.5,22.5 | 135.5,41 134.5,41 U4.7 | 162.5,22.5 164,21 J3.4 | 155.5,9.5 162.5,16.5 162.5,22.5 | v28,61.5 20.5,61.5 18,64 18,64.5 U2.20 | U3.16 90,50 v90.5,50 91.5,49 91.5,47.7 91.7,47.5 91.8,47.5 129.5,47.5 135.5,41.5 135.5,41
  Bottom 0.15: v28,61.5 39,50.5 39.5,50 39.6,50 v90.5,50
SDA  (via drill 0.3)
  Top 0.15: 159.5,1 160,0.5 169.5,0.5 169.5,17 166.5,20 164.5,20 J3.3 | 159.5,1 155.5,5 155.5,5.5 154.5,5.5 R1_PINH.1 | 148.5,8.1 148.5,6 154,0.5 159.5,0.5 159.5,1 | 148.5,8.1 148.5,8.2 | SENSOR2.3 154,10.5 153,10.5 153,10.35 151.15,8.5 148.8,8.5 148.2,8.5 | 116.5,46.5 90.4,46.5 90.3,46.5 90,46.8 90,48.2 89.7,48.5 89,48.5 89,49 88.5,49.5 88.5,50 U3.15 88.5,50.5 88.5,51 v87,52.5 | 116.5,46.5 117,46.5 129.5,46.5 134.5,41.5 U4.8 | v77.5,62 21,62 19,64 19,64.5 U2.19 | 148.5,8.1 148.5,8.2 | 148.5,8.2 148.2,8.5 | 148.2,8.5 131.7,25 130.4,25 117.4,25 117,25.4 117,46.1 116.6,46.5 116.5,46.5
  Bottom 0.15: v87,52.5 v77.5,62
SRC
  Top 0.15: C4.2 94.5,39.5 95.3,39.5 95.5,39.7 95.5,40 95.5,41 94,42.5 81.8,42.5 81.7,42.5 81.5,42.3 81.5,42 D5.2 81,41.5 81,39 81.7,38.3 81.7,37.8 81.7,37.4 | Q3.3 70,15.5 72.3,15.5 72.5,15.7 72.5,15.8 72.5,24 81,32.5 81,36.1 81.7,36.8 81.7,37.4 | L1.1 81.42,37.12 81.7,37.4
SS_SD  (via drill 0.3)
  Top 0.15: R10.1 9.5,99 12,99 D8.2 12.31,98.77 7.5,93.96 7.5,89 6.5,88 | v11.5,52 11.5,47.5 U2.4 | 6.5,88 v7,87.5 | 6.5,88 J4.P2 6.5,88
  Bottom 0.15: v11.5,52 11.5,83 v7,87.5
TX
  Top 0.15: TP1.TP 11.48,69.12 U2.25
USB_D+  (via drill 0.3)
  Top 0.15: v148.5,50.5 151.5,50.5 D1.3 | v40,49.5 39,49.5 36,46.5 24.5,46.5 24.5,47 U2.14
  Bottom 0.15: v148.5,50.5 92,50.5 91,49.5 v40,49.5
USB_D-  (via drill 0.3)
  Top 0.15: v93.5,58 93.5,66.1 93.5,66.2 93.8,66.5 140.5,66.5 152,55 152,52.5 D1.1 | v42,50.5 37.5,46 23.2,46 23,46.2 23,47 U2.13
  Bottom 0.15: v93.5,58 86,50.5 v42,50.5
VBAT
  Top 0.3: 132.5,41 132.5,40.5 U4.3 | 132.5,41 U4.2 132.5,41 | 130.5,41 129,41 MCP73831.3 | 130.5,41 131,41 132.5,41 | C2_BAT.1 121,34.5 124.5,38 130.5,38 Q1.3 131,38.5 131,39.3 131,39.7 | 131,39.7 131,40.5 130.5,41 | TP3.TP 133.14,39.3 131.6,39.3 131.4,39.3 131,39.7
VBUS  (via drill 0.3)
  Top 0.3: 155,51.5 155.5,52 155.5,53 156,53.5 C5_USB.1 | 155,51.5 154.5,51.5 D1.5 | 147.5,48.7 147.5,41.5 PFMF.050.1.2 147,41.5 v144,41.5 | 147.5,48.7 147.5,49.5 147.5,53.8 147.5,54 148,54.5 149.5,54.5 C4_USB.1 | 155,51.5 155.5,51 155.5,50 155,49.5 148.1,49.5 147.5,48.9 147.5,48.7 | CHG_LED.A 123.5,40.5 125,40.5 125.5,41 126,41 MCP73831.4 126.5,41 126.5,42.4 127.1,43 | C1_BAT.1 129,43.5 127.6,43.5 127.1,43 | 129.5,33.8 129.5,36 Q1.1 | 129.5,33.8 129.5,33.6 129.5,33 129.5,30.6 129.5,30.5 130,30 130.5,30 D2.2 131,30 134,30 135.5,31.5 R1_PWRUSB.2 135.5,32 v135,32.5 | TP14.TP 119.22,43.02 119.22,41.88 119.25,41.85 | 129.5,33.8 129.5,33.7 128.9,33.1 128.8,33 119,33 118,34 118,40.5 118,40.6 119.25,41.85 | 127.1,43 126.5,43 120.4,43 119.25,41.85
  Bottom 0.3: v135,32.5 v144,41.5
VRTC  (via drill 0.3)
  Top 0.3: R_CAPACITOR.2 92.5,48.5 v93.5,48.5 95,48.5 CPH3225A.2 | C8.1 89,48 v88.5,48.5 87,50 U3.14
  Bottom 0.3: v88.5,48.5 v93.5,48.5
VUSB  (via drill 0.35)
  Top 0.3: PFMF.050.1.1 151.5,41.5 149,44 149,45.6 149.4,46 158,46 161,49 161,51.3 161.7,52 v162.2,52 163.52,52 J2.B9 J2.A4 | J2.A9 J2.B4 161.92,56.58 v161.9,56.6
  Bottom 0.3: v161.9,56.6 160.5,55.2 160.4,55.1 160.4,54.9 160.4,53 160.9,52.5 161.9,52.5 162,52.5 162.2,52.3 v162.2,52